# Altium PCB ROS_CAR.PcbDoc (part 1 of 13)
Units mil, origin at the board's own origin, x right, y up, seen from the top; angles counter-clockwise.
Board outline 3937.01 x 3937.01 mil, 2 copper layers (Top Layer, Bottom Layer); 201 components, 155 nets, 998 pads, 0 vias.
Unrouted connection lines stored in the file: 3.
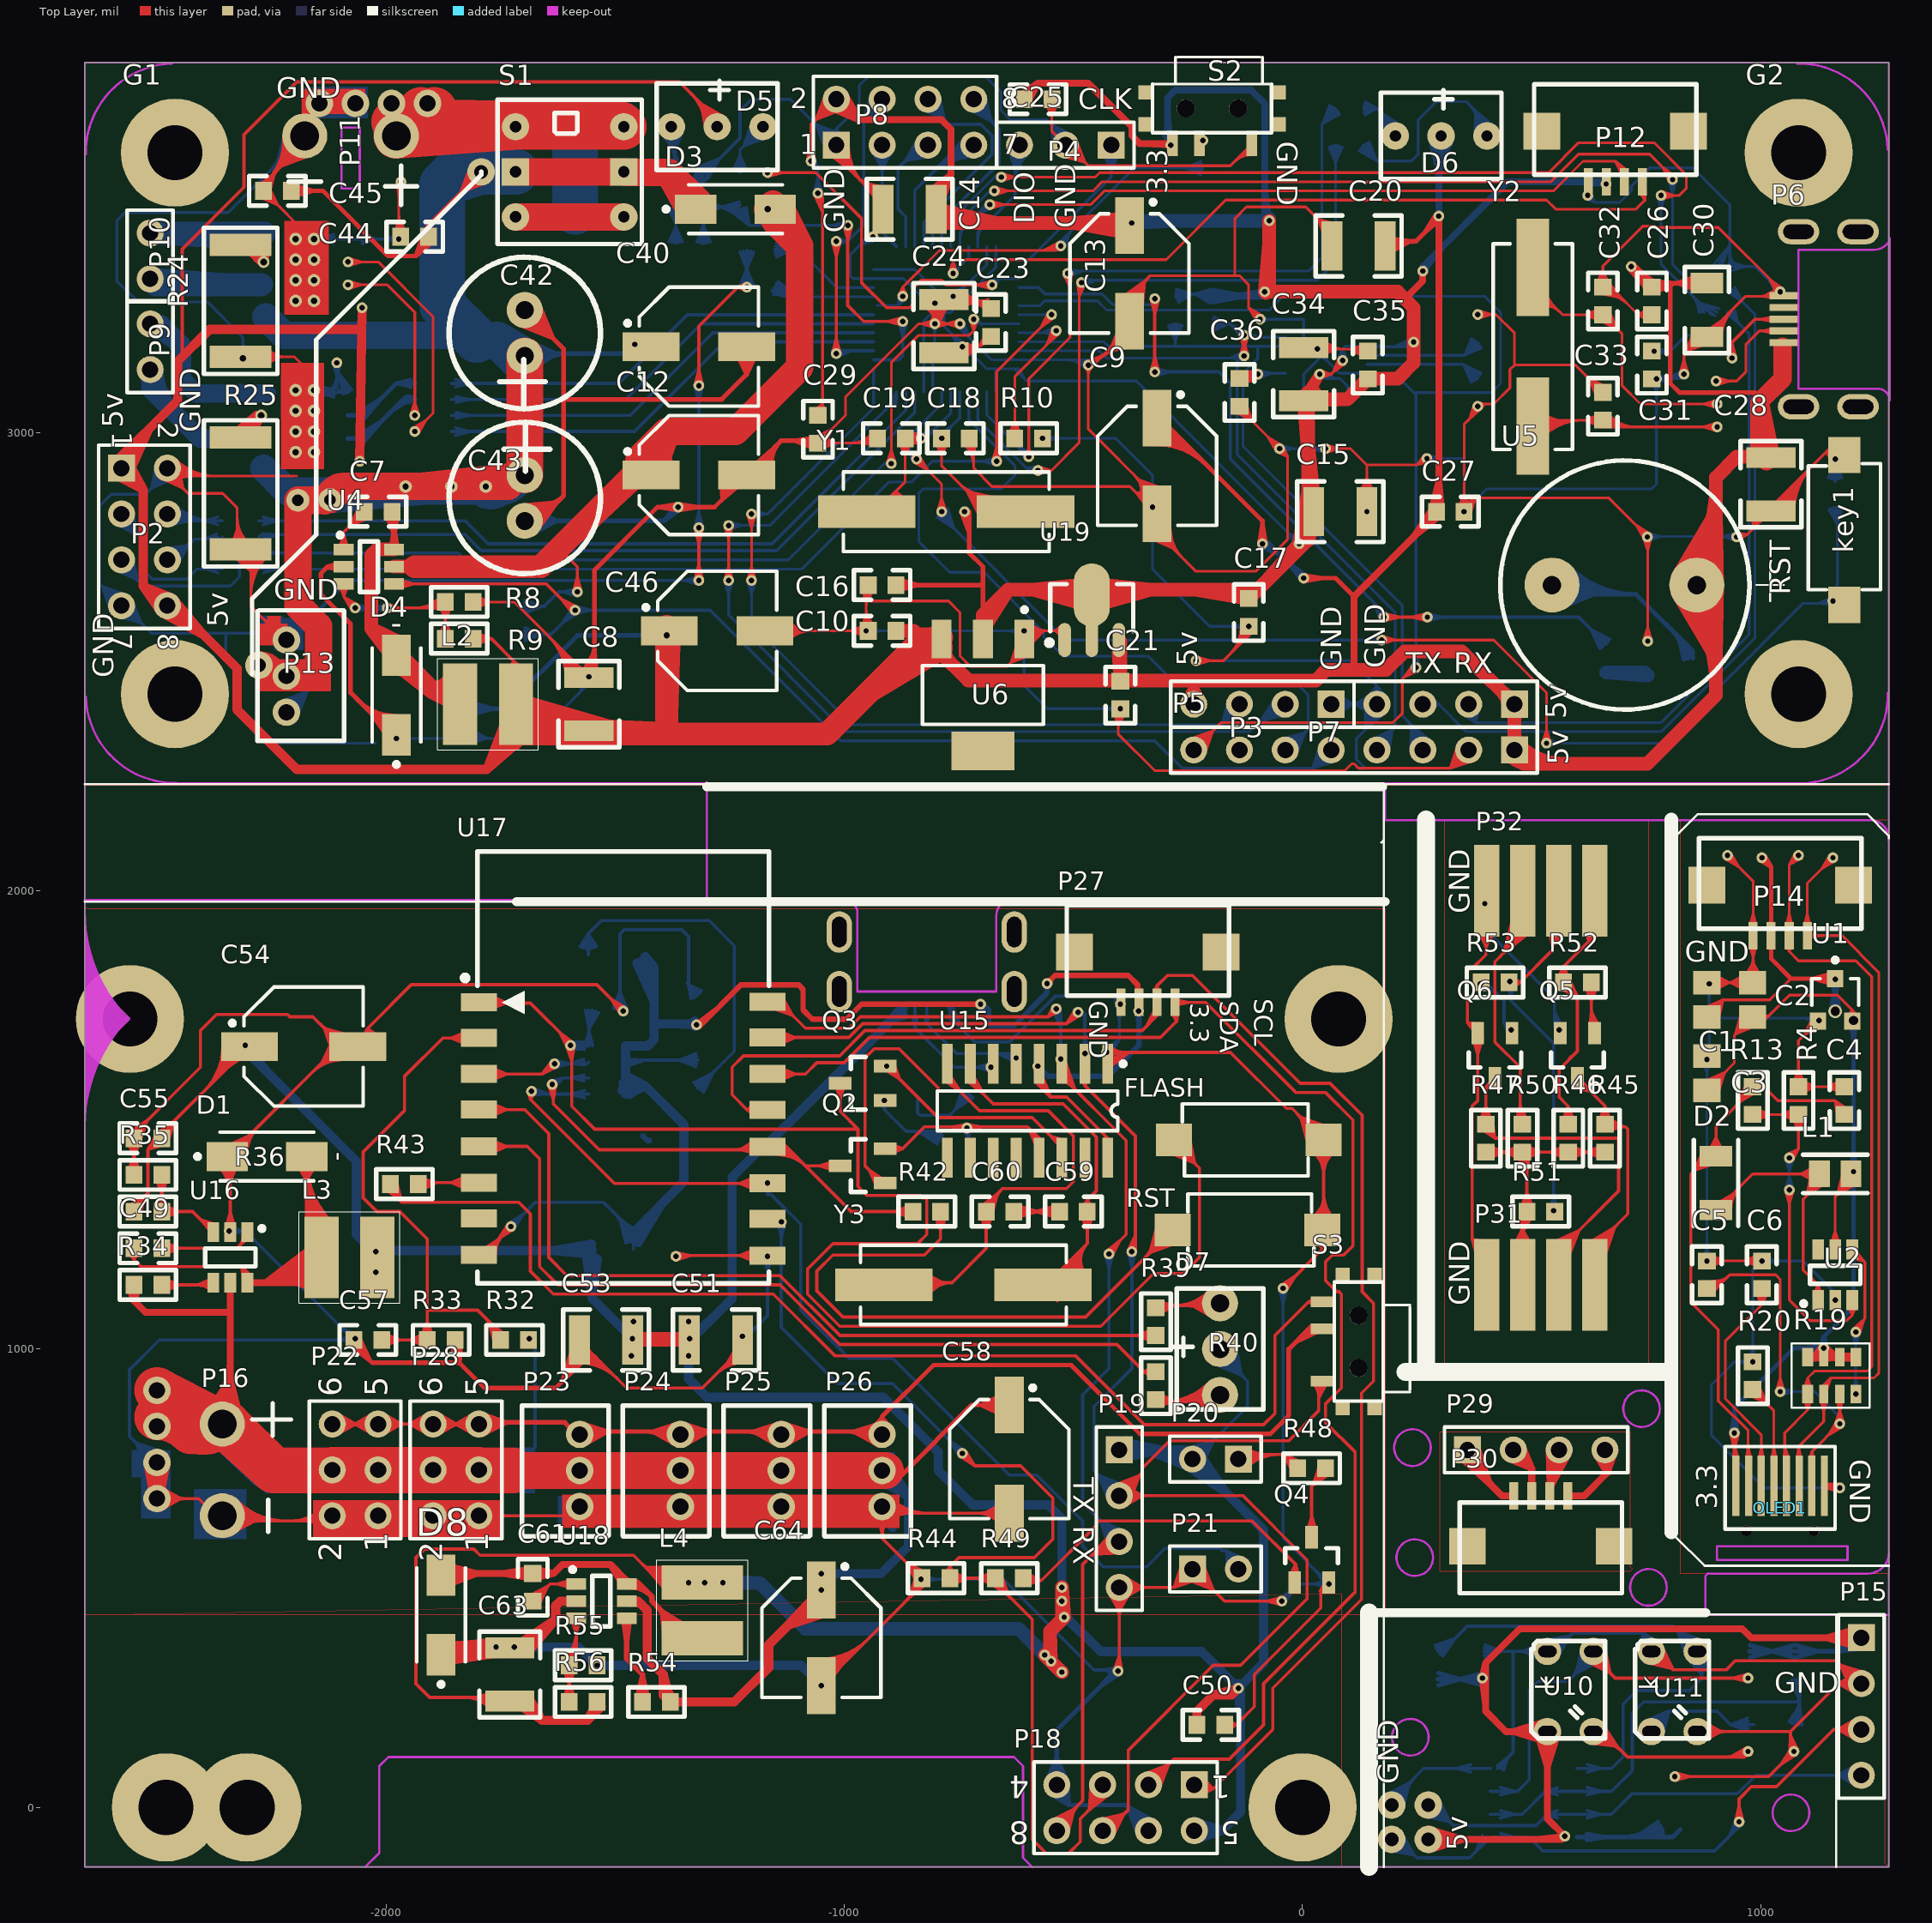
[diagram p0: Top Layer view]
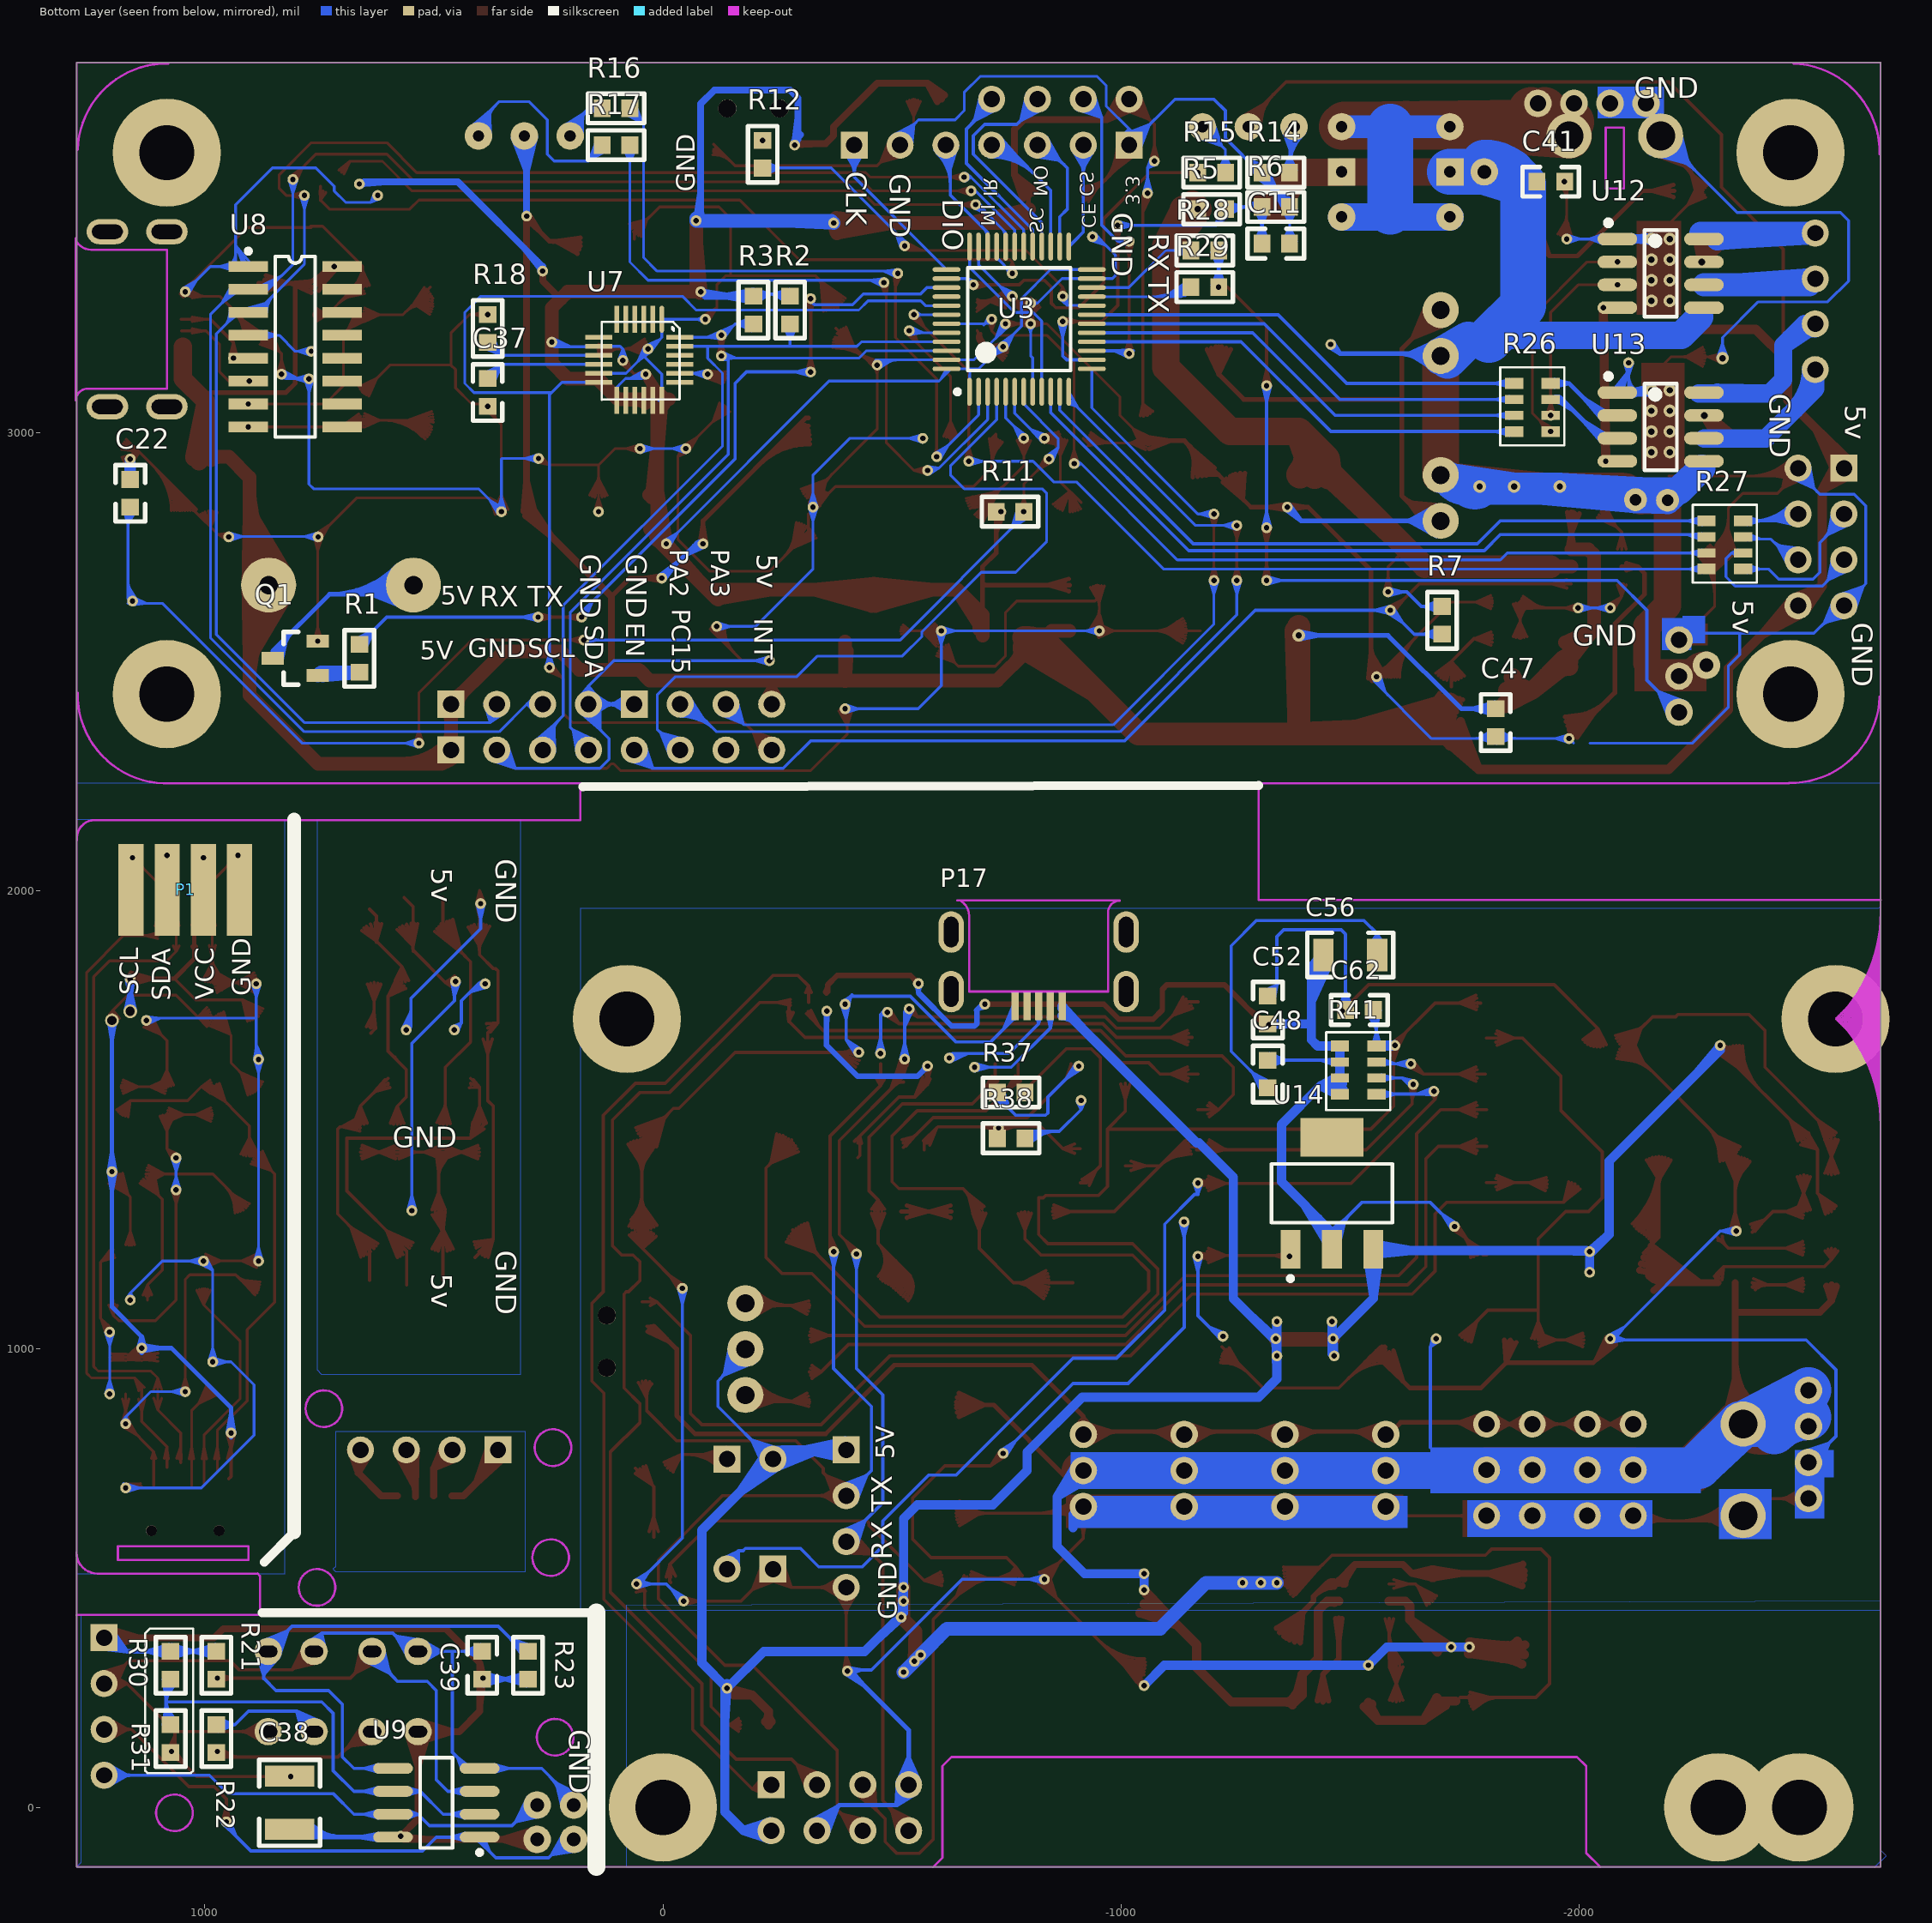
[diagram p1: Bottom Layer view, seen from below]

## Layer stack, top to bottom
Top Layer: signal copper 1.4
Dielectric: dielectric 12.6, FR-4, Dk 4.8
Bottom Layer: signal copper 1.4

## Board outline
-2657.48,-129.92 1279.53,-129.92 1279.53,3807.09 -2657.48,3807.09

## Design rules (kind name [scope] priority, off if disabled: settings)
Clearance Clearance_4 [InNamedPolygon('Top Overlay-No Net') Or  InNamedPolygon('Top Overlay-No Net') Or  InNamedPolygon('Top Overlay-No Net') Or  InNamedPolygon('Top Overlay-No Net') Or  InNamedPolygon('Top Overlay-No Net') Or  InNamedPolygon('Top Overlay-No Net') Or  InNamedPolygon('Top Overlay-No Net') Or  InNamedPolygon('Top Overlay-No Net') Or  InNamedPolygon('Top Overlay-No Net') Or  InNamedPolygon('Top Overlay-No Net') Or  InNamedPolygon('Top Overlay-No Net') Or  InNamedPolygon('Top Overlay-No Net') Or  InNamedPolygon('Top Overlay-No Net') Or  InNamedPolygon('Top Overlay-No Net')] p1: gap=15
Clearance Clearance_3 [InNamedPolygon('Top Overlay-No Net') Or  InNamedPolygon('Top Overlay-No Net')] p2: gap=15
Clearance Clearance_2 [InNamedPolygon('Top Overlay-No Net')] p3: gap=10
Clearance Clearance_1 [InNamedPolygon('Bottom Layer-No Net 1')] p4: gap=10
Clearance [All] p5: gap=5
ComponentClearance [All] p1: gap=10 collisioncheckmode=3 verticalgap=10
PolygonConnect PolygonConnect_4 [All vs IsNamedPolygon('Top Overlay-No Net')] p1: connectstyle=Relief reliefconductorwidth=10 reliefentries=4 polygonreliefangle="90 Angle"
PolygonConnect PolygonConnect_3 [All vs IsNamedPolygon('Top Overlay-No Net') Or  IsNamedPolygon('Top Overlay-No Net') Or  IsNamedPolygon('Top Overlay-No Net') Or  IsNamedPolygon('Top Overlay-No Net') Or  IsNamedPolygon('Top Overlay-No Net') Or  IsNamedPolygon('Top Overlay-No Net') Or  IsNamedPolygon('Top Overlay-No Net') Or  IsNamedPolygon('Top Overlay-No Net') Or  IsNamedPolygon('Top Overlay-No Net') Or  IsNamedPolygon('Top Overlay-No Net') Or  IsNamedPolygon('Top Overlay-No Net') Or  IsNamedPolygon('Top Overlay-No Net') Or  IsNamedPolygon('Top Overlay-No Net') Or  IsNamedPolygon('Top Overlay-No Net')] p2: connectstyle=Relief reliefconductorwidth=10 reliefentries=4 polygonreliefangle="90 Angle"
PolygonConnect PolygonConnect_2 [All vs IsNamedPolygon('Top Overlay-No Net')] p3: connectstyle=Direct reliefconductorwidth=10 reliefentries=4 polygonreliefangle="90 Angle"
PolygonConnect PolygonConnect_1 [All vs IsNamedPolygon('Top Overlay-No Net')] p4: connectstyle=Relief reliefconductorwidth=10 reliefentries=4 polygonreliefangle="90 Angle"
PolygonConnect [All] p5: connectstyle=Relief reliefconductorwidth=10 reliefentries=4 polygonreliefangle="90 Angle"
RoomDefinition moto2 [InComponentClass('moto2')] p1: confinementstyle=ConfineIn formatcopy=TRUE lockcomponents=FALSE outline -4657.48,-3129.92 -2657.48,-3129.92 -2657.48,-2129.92 -4657.48,-2129.92
RoomDefinition ESP_12主板 [InComponentClass('ESP_12主板')] p2: confinementstyle=ConfineIn formatcopy=TRUE lockcomponents=FALSE outline -4657.48,-3129.92 -2657.48,-3129.92 -2657.48,-2129.92 -4657.48,-2129.92
RoomDefinition 电机驱动 [InComponentClass('电机驱动')] p3: confinementstyle=ConfineIn formatcopy=TRUE lockcomponents=FALSE outline -4657.48,-3129.92 -2657.48,-3129.92 -2657.48,-2129.92 -4657.48,-2129.92
RoomDefinition 电机码盘 [InComponentClass('电机码盘')] p4: confinementstyle=ConfineIn formatcopy=TRUE lockcomponents=FALSE outline -4657.48,-3129.92 -2657.48,-3129.92 -2657.48,-2129.92 -4657.48,-2129.92
RoomDefinition stm32_ros_car [InComponentClass('stm32_ros_car')] p5: confinementstyle=ConfineIn formatcopy=TRUE lockcomponents=FALSE outline -4657.48,-3129.92 -2657.48,-3129.92 -2657.48,-2129.92 -4657.48,-2129.92
RoomDefinition OLED096 [InComponentClass('OLED096')] p6: confinementstyle=ConfineIn formatcopy=TRUE lockcomponents=FALSE outline -4657.48,-3129.92 -2657.48,-3129.92 -2657.48,-2129.92 -4657.48,-2129.92
RoutingVias [All] p1: holewidth=23.62 width=39.37 viastyle="Through Hole" minholewidth=28 minwidth=50 maxholewidth=28 maxwidth=50
SolderMaskExpansion [All] p1: expansion=4
TestPointUsage [All] p1: valid=0 allowmultiple=FALSE
Testpoint [All] p1: side=15 testpointundercomponent=TRUE minsize=40 maxsize=100 preferedsize=60 minholesize=0 maxholesize=40 preferedholesize=32 testpointgrid=1 style=1023 order=0-112345678
Width [All] p1: maxlimit=100 minlimit=6 preferedwidth=7
18 further rules are at their usual default settings.

## Classes and differential pairs
component class ESP_12主板: C48 C49 C50 C51 C52 C53 C54 C55 C56 C57 C58 C59 C60 C61 C62 C63 C64 D1 D7 D8 FLASH L3 L4 P16 P17 P18 P19 P20 P21 P22 P23 P24 P25 P26 P27 P28 Q2 Q3 Q4 R32 R33 R34 R35 R36 R37 R38 R39 R40 R41 R42 R43 R44 R48 R49 R54 R55 R56 RST S3 U14 U15 U16 U17 U18 Y3
component class stm32_ros_car: C7 C8 C9 C10 C11 C12 C13 C14 C15 C16 C17 C18 C19 C20 C21 C22 C23 C24 C25 C26 C27 C28 C29 C30 C31 C32 C33 C34 C35 C36 C37 D3 D4 D5 D6 key1 L2 P2 P3 P4 P5 P6 P7 P8 P11 P12 P13 Q1 R1 R2 R3 R5 R6 R7 R8 R9 R10 R11 R12 R14 R15 R16 R17 R18 R27 R28 R29 S1 S2 U3 U4 U5 U6 U7 U8 U19 Y1 Y2
component class 电机驱动: C40 C41 C42 C43 C44 C45 C46 C47 G1 G2 P9 P10 R24 R25 R26 U12 U13
component class OLED096: C1 C2 C3 C4 C5 C6 D2 L1 OLED1 P1 P14 P29 P30 R4 R13 R19 R20 U1 U2
component class 电机码盘: C38 C39 P15 R21 R22 R23 R30 R31 U9 U10 U11
component class moto2: P31 P32 Q5 Q6 R45 R46 R47 R50 R51 R52 R53

## Components (designator, comment, footprint, x,y, rotation, side; value= is the part's Value field where it differs from the comment)
C1 "Cap" 6-0805 882.52,1762.09 r90 top
C2 "Cap" 6-0805 982.52,1762.09 r90 top
C3 "Cap" 6-0805 882.52,1602.09 r90 top
C4 "Cap" LC-0603_C 1182.52,1542.09 r90 top
C5 "Cap" LC-0603_C 882.52,1162.09 r270 top
C6 "Cap" LC-0603_C 1002.52,1162.09 r90 top
C7 "Cap" LC-0603_C -2017.48,2827.09 r0 top
C8 "10uF  5V" LC-1210_C -1557.48,2407.09 r90 top
C9 "100uF 5V" 电容HONOR_63X77#1 -317.48,2927.09 r270 top
C10 "Cap" LC-0603_C -917.48,2567.09 r0 top
C11 "0.1uF" LC-0603_C -1337.48,3412.09 r180 bottom
C12 "Cap Pol1" 电容HONOR_63X54#1 -1317.48,2907.09 r0 top
C13 "10uF" 电容HONOR_63X77#1 -377.48,3347.09 r270 top
C14 "10uF" LC-1210_C -857.48,3487.09 r180 top
C15 "10uF" LC-1210_C 82.52,2827.09 r0 top
C16 "Cap" LC-0603_C -917.48,2667.09 r180 top
C17 "Cap" LC-0603_C -117.48,2607.09 r270 top
C18 "CAP" LC-0603_C -757.48,2987.09 r180 top
C19 "CAP" LC-0603_C -897.48,2987.09 r0 top
C20 "10uF" LC-1210_C 122.52,3407.09 r180 top
C21 "Cap" LC-0603_C -397.48,2427.09 r270 top
C22 "Cap" LC-0603_C 1162.52,2867.09 r90 bottom
C23 "Cap" LC-0603_C -680,3240 r90 top
C24 "" LC-1210_C -782.48,3232.09 r90 top
C25 "Cap" LC-0603_C -577.48,3727.09 r0 top
C26 "CAP" LC-0603_C 762.52,3287.09 r90 top
C27 "Cap" LC-0603_C 322.52,2827.09 r0 top
C28 "Cap" LC-1210_C 1022.52,2887.09 r90 top
C29 "Cap" LC-0603_C -1057.48,3007.09 r270 top
C30 "CAP" LC-1206_C 882.52,3267.09 r270 top
C31 "CAP" LC-0603_C 762.52,3147.09 r90 top
C32 "CAP" LC-0603_C 655.51,3287.09 r270 top
C33 "CAP" LC-0603_C 655.51,3057.09 r270 top
C34 "Cap Pol1" LC-1210_C 2.52,3127.42 r90 top
C35 "Cap" LC-0603_C 142.52,3147.09 r270 top
C36 "Cap" LC-0603_C -137.48,3087.09 r90 top
C37 "Cap" LC-0603_C 382.52,3087.09 r90 bottom
C38 "Cap Pol1" LC-1210_C 814.53,10.08 r90 bottom
C39 "Cap" LC-0603_C 394.53,310.08 r90 bottom
C40 "100uF 50v" 电容HONOR_63X77#1 -1317.48,3187.09 r0 top
C41 "Cap" LC-0603_C -1937.48,3547.09 r180 bottom
C42 "Cap Pol1" 100UF -1697.48,3167.09 r90 top
C43 "Cap Pol1" 100UF -1697.48,2907.09 r270 top
C44 "" LC-0603_C -1937.48,3427.09 r180 top
C45 "" LC-0603_C -2237.48,3527.09 r180 top
C46 "10uF" 电容HONOR_63X77#1 -1277.48,2567.09 r0 top
C47 "Cap" LC-0603_C -1817.48,2367.09 r270 bottom
C48 "CAP" LC-0603_C -1320,1600 r90 bottom
C49 "Cap" LC-0603_C -2520,1220 r180 top
C50 "Cap" LC-0603_C -200,180 r0 top
C51 "Cap" LC-1210_C -1280,1020 r180 top
C52 "Cap" LC-0603_C -1320,1740 r90 bottom
C53 "10uF  5V" LC-1210_C -1520,1020 r180 top
C54 "100uF 5V" 电容HONOR_63X77#2 -2180,1660 r0 top
C55 "Cap" LC-0603_C -2520,1460 r0 top
C56 "CAP" LC-1206_C -1500,1860 r180 bottom
C57 "0.1uF" LC-0603_C -2040,1020 r180 top
C58 "Cap Pol1" 电容HONOR_63X54#2 -640,760 r270 top
C59 "CAP" LC-0603_C -500,1300 r0 top
C60 "CAP" LC-0603_C -660,1300 r180 top
C61 "Cap" LC-0603_C -1680,480 r90 top
C62 "Cap" LC-0603_C -1520,1740 r0 bottom
C63 "10uF  5V" LC-1210_C -1730,290 r90 top
C64 "Cap Pol1" 电容HONOR_63X54#1 -1050,370 r270 top
D1 "1N5819" SMA -2260,1420 r0 top
D2 "1210" LC-1206_L 902.52,1362.09 r90 top
D3 "1N5819" SMA -1237.48,3487.09 r0 top
D4 "1N5819" SMA -1977.48,2427.09 r90 top
D5 "双色共阳led" 共阳双色LED#1 -1277.48,3667.09 r0 top
D6 "双色共阳led" 共阳双色LED#1 302.52,3647.09 r0 top
D7 "双色共阳led" 共阳双色LED#2 -180,1000 r90 top
D8 "1N5819" SMA -1880,420 r90 top
FLASH "KEY" SMD轻触按键 -117.48,1456.38 r180 top (schematic designator key2)
G1 "螺丝孔" M3螺丝孔#1 -2457.48,3610.08 r0 top
G2 "螺丝孔" M3螺丝孔#2 1082.52,3630.08 r0 top
key1 "KEY" SMD轻触按键 1182.52,2787.09 r90 top
L1 "Inductor Iron" LC-0805_L 1162.52,1382.09 r180 top
L2 "Inductor Iron" 电感GDCD4532 -1777.48,2407.09 r0 top
L3 "Inductor Iron" 电感GDCD4532 -2080,1200 r0 top
L4 "Inductor Iron" 电感GDCD4532 -1310,430 r90 top
OLED1 "OLED-0.69" OLED-0.69 1042.52,702.09 r0 top
P1 "4贴片排针" 4针贴片接头2.0 1042.52,2002.09 r90 bottom
P2 "编码器接口" HDR2X4 -2577.48,2922.09 r270 top
P3 "超声波" HDR1X4 62.52,2407.09 r180 top
P4 "Header 3" HDR1X3 -417.48,3627.09 r180 top
P5 "Header 8" HDR1X8 462.52,2307.09 r180 top
P6 "micro USB" "micro 5P沉板式0.8四脚全插无导位有孔" 1082.52,3247.09 r0 top
P7 "串口" HDR1X4 462.52,2407.09 r180 top
P8 "NRF24l01" HDR2X4 -1017.48,3627.09 r0 top
P9 "Header 2" HDR1X2#1 -2515,3137.09 r90 top
P10 "Header 2" HDR1X2#1 -2515,3335 r90 top
P11 "POWER" 电源 -2077.48,3647.09 r180 top
P12 "OLED" "1.0MM 翻盖 下接 FPC连接器 4P" 682.52,3547.09 r270 top
P13 "Header 3" "AMP 3针连接件"#1 -2217.48,2547.09 r0 top
P14 "micro USB" "1.0MM 翻盖 下接 FPC连接器 4P" 1042.52,1902.09 r270 top
P15 "Header 4" HDR1X4 1219.53,370.08 r270 top
P16 "POWER" 电源 -2357.48,736.38 r270 top
P17 "micro USB" "micro 5P沉板式0.8四脚全插无导位有孔" -820,1780 r90 bottom
P18 "Header 4X2A" HDR2X4_CEN -236.22,49.28 r180 top
P19 "Header 4" HDR1X4 -400,780 r270 top
P20 "Header 2" HDR1X2#2 -140,760 r180 top
P21 "Header 2" HDR1X2#2 -240,520 r0 top
P22 "Header 3X2" HDR2X3 -2017.48,636.38 r90 top
P23 "Header 3" "AMP 3针连接件"#2 -1577.48,656.38 r180 top
P24 "Header 3" "AMP 3针连接件"#2 -1357.48,656.38 r180 top
P25 "Header 3" "AMP 3针连接件"#2 -1137.48,656.38 r180 top
P26 "Header 3" "AMP 3针连接件"#2 -917.48,656.38 r180 top
P27 "OLED" "1.0MM 翻盖 下接 FPC连接器 4P" -337.48,1756.38 r270 top
P28 "Header 3X2" HDR2X3 -1797.48,636.38 r90 top
P29 "Header 4" HDR1X4 360,780 r0 top
P30 "micro USB" "1.0MM 翻盖 下接 FPC连接器 4P" 520,680 r90 top
P31 "外接IO" 4针贴片接头2.0 520,1140 r90 top
P32 "电机端" 4针贴片接头2.0 520,2000 r90 top
Q1 "NPN" LC-SOT-23 802.52,2507.09 r180 bottom
Q2 "NPN" LC-SOT-23 -960,1400 r0 top
Q3 "NPN" LC-SOT-23 -960,1580 r0 top
Q4 "NPN" LC-SOT-23 20,540 r270 top
Q5 "NPN" LC-SOT-23 600,1640 r90 top
Q6 "NPN" LC-SOT-23 420,1640 r90 top
R1 "Res2" LC-0603_R 662.52,2507.09 r90 bottom
R2 "Res2" LC-0603_R -277.48,3267.09 r270 bottom
R3 "Res2" LC-0603_R -197.48,3267.09 r270 bottom
R4 "Res2" LC-0603_R 1082.52,1542.09 r90 top
R5 "Res2" LC-0603_R -1197.48,3487.09 r180 bottom
R6 "Res2" LC-0603_R -1337.48,3492.09 r180 bottom
R7 "Res2" LC-0603_R -1700.47,2590.08 r90 bottom
R8 "Res2" LC-0603_R -1840.47,2630.08 r0 top
R9 "Res2" LC-0603_R -1840.47,2550.08 r180 top
R10 "Res2" LC-0603_R -597.48,2987.09 r180 top
R11 "Res2" LC-0603_R -757.48,2827.09 r180 bottom
R12 "Res2" LC-0603_R -217.48,3607.09 r90 bottom
R13 "Res2" LC-0603_R 982.52,1542.09 r270 top
R14 "Res2" LC-0603_R -1337.48,3567.09 r180 bottom
R15 "Res2" LC-0603_R -1197.48,3567.09 r180 bottom
R16 "Res2" LC-0603_R 102.52,3707.09 r0 bottom
R17 "Res2" LC-0603_R 102.52,3627.09 r0 bottom
R18 "Res2" LC-0603_R 382.52,3227.09 r90 bottom
R19 "RES_PACK4" RES4 1102.52,982.09 r270 top
R20 "Res2" LC-0603_R 982.52,942.09 r270 top
R21 "Res2" LC-0603_R 974.53,310.08 r270 bottom
R22 "Res2" LC-0603_R 974.53,150.08 r90 bottom
R23 "Res2" LC-0603_R 294.53,310.08 r90 bottom
R24 "Res2" LC-2512_R -2317.48,3287.09 r270 top
R25 "Res2" LC-2512_R -2317.48,2867.09 r270 top
R26 "RES_PACK4" RES4 -1937.48,3107.09 r0 bottom
R27 "RES_PACK4" RES4 -2357.48,2807.09 r0 bottom
R28 "Res2" LC-0603_R -1182.48,3397.09 r180 bottom
R29 "Res2" LC-0603_R -1182.48,3317.09 r180 bottom
R30 "Res2" LC-0603_R 1074.53,310.08 r270 bottom
R31 "Res2" LC-0603_R 1074.53,150.08 r270 bottom
R32 "Res2" LC-0603_R -1720,1020 r180 top
R33 "Res2" LC-0603_R -1880,1020 r0 top
R34 "Res2" LC-0603_R -2520,1140 r180 top
R35 "Res2" LC-0603_R -2520,1380 r180 top
R36 "Res2" LC-0603_R -2520,1300 r0 top
R37 "Res2" LC-0603_R -760,1560 r180 bottom
R38 "Res2" LC-0603_R -760,1460 r180 bottom
R39 "Res2" LC-0603_R -320,1060 r90 top
R40 "Res2" LC-0603_R -320,920 r270 top
R41 "RES_PACK4" RES4 -1477.48,1556.38 r180 bottom
R42 "Res2" LC-0603_R -820,1300 r0 top
R43 "Res2" LC-0603_R -1960,1360 r0 top
R44 "Res2" LC-0603_R -800,500 r180 top
R45 "Res2" LC-0603_R 660,1460 r90 top
R46 "Res2" LC-0603_R 580,1460 r270 top
R47 "Res2" LC-0603_R 400,1460 r90 top
R48 "Res2" LC-0603_R 20,740 r0 top
R49 "Res2" LC-0603_R -640,500 r180 top
R50 "Res2" LC-0603_R 480,1460 r90 top
R51 "Res2" LC-0603_R 520,1300 r180 top
R52 "Res2" LC-0603_R 600,1800 r180 top
R53 "Res2" LC-0603_R 420,1800 r0 top
R54 "Res2" LC-0603_R -1410,230 r0 top
R55 "Res2" LC-0603_R -1570,310 r0 top
R56 "Res2" LC-0603_R -1570,230 r180 top
RST "KEY" SMD轻触按键 -120,1260 r0 top (schematic designator key3)
S1 "8*8电源开关" 8*8自锁开关 -1717.48,3667.09 r0 top
S2 "贴片开关" KEY -197.48,3707.09 r270 top
S3 "贴片开关" KEY 122.52,1016.38 r180 top
U1 "ME6206AXX" sot23 1162.52,1762.09 r0 top
U2 "SY7208" LC-SOT-23-6 1162.52,1162.09 r270 top
U3 "STM32F103C8T6" LQFP48_L -777.48,3247.09 r90 bottom
U4 "MP2359DJ" LC-SOT-23-6 -2037.48,2707.09 r180 top
U5 "蜂鸣器" BELL 702.52,2667.09 r0 top
U6 "LM1117-3.3" SOT223 -697.48,2427.09 r180 top
U7 "MPU6050" QFN24 2.52,3247.09 r270 bottom
U8 "CH340G" SOP16M 802.52,3187.09 r270 bottom
U9 "LM393D" SO8_N 494.53,10.08 r0 bottom
U10 "光电对管" 马达光电对管 534.61,165.35 r90 top
U11 "光电对管" 马达光电对管 761.38,165.35 r90 top
U12 "A4950" LC-SOIC-8_150mil -2177.48,3347.09 r270 bottom
U13 "A4950" LC-SOIC-8_150mil -2177.48,3012.09 r270 bottom
U14 "LM1117-3.3" SOT223 -1460,1340 r180 bottom
U15 "CH340G" SOP16M -600,1520 r180 top
U16 "MP2359DJ" LC-SOT-23-6 -2340,1200 r90 top
U17 "ESP-12F" ESP_12 -1797.48,1756.38 r0 top
U18 "MP2492" LC-SOT-23-6 -1530,450 r180 top
U19 "ME6206AXX" LC-SOT-89 -460,2547.09 r270 top
Y1 "12MHz" 49SMD -777.48,2827.09 r0 top
Y2 "12MHz" 49SMD 502.52,3187.09 r90 top
Y3 "12MHz" 49SMD -740,1140 r0 top

## Footprints (in the part's own frame and the unit in brackets; to place one, negate y for a bottom-side part, rotate by r counter-clockwise, add the part's x,y. Pads: shape width x height; smd on the part's side, far side on the other; paste and mask are expansions set on the pad)
"1.0MM 翻盖 下接 FPC连接器 4P" [mil]
  rect 60x19.68 smd: 1(0,59.06) 2(0,19.69) 3(0,-19.68) 4(0,-59.06)
  rect 80x80 smd: ""(-110,160) ""(-110,-160)
  silkscreen extent -213,-177 -15,177
4针贴片接头2.0 [mm] "2mm间距"
  rect 5.08x1.4 smd: 1(0,3) 2(0,1) 3(0,-1) 4(0,-3)
6-0805 [mm] "Chip Resistor; Body 2.0 x 1.3 mm (LxW typ)"
  rect 1.3x1.5 smd: 1(-0.95,0) 2(0.95,0)
8*8自锁开关 [mil]
  rect 60x60 hole 25: 1(0,-98.43) 1(236.22,-98.43)
  round 60 hole 25: 2(0,-196.85) 2(0,0) 2(236.22,-196.85) 2(236.22,0)
  silkscreen extent -39,-256 276,59
49SMD [mm]
  rect 5.4x1.8 smd: 1(-4.4,0) 2(4.4,0)
  silkscreen extent -5.7,-2.2 5.7,2.2
100UF [mm]
  round 2 hole 1: 1(0,0) 2(2.54,0)
  silkscreen extent -6.4,-4.2 5.47,4.2
"AMP 3针连接件"#1 [mil] "舵机接头"
  round 60 hole 35.4: 1(0,0) 2(0,-78.74) 3(0,-157.48)
  silkscreen extent -63,-220 126,65
"AMP 3针连接件"#2 [mil] "舵机接头"
  round 60 hole 35.43: 1(0,0) 2(0,-78.74) 3(0,-157.48)
  silkscreen extent -63,-220 126,65
BELL [mil]
  round 120 hole 40: 1(158,0) 2(-158,0)
  silkscreen extent -271,-272 348,272
ESP_12 [mm]
  rect 2x1 smd: 1(0,0) 2(0,-1.97) 3(0,-3.97) 4(0,-5.94) 5(0,-7.98) 6(0,-9.99) 7(0,-11.98) 8(0,-13.99) 9(16,-14.03) 10(16,-11.99) 11(16,-10.03) 12(16,-8.01) 13(16,-5.95) 14(16,-3.97) 15(16,-1.95) 16(16,0.03)
  silkscreen extent -0.91,-15.57 16.08,8.37
HDR1X2#1 [mm] "Connector; Header; 2 Position"
  round 1.5 hole 0.9: 1(0,0) 2(2.54,0)
  silkscreen extent -1.27,-1.27 3.81,1.27
HDR1X2#2 [mm] "Connector; Header; 2 Position"
  rect 1.5x1.5 hole 0.9: 1(0,0)
  round 1.5 hole 0.9: 2(2.54,0)
  silkscreen extent -1.27,-1.27 3.81,1.27
HDR1X3 [mm] "Connector; Header; 3 Position"
  rect 1.5x1.5 hole 0.9: 1(0,0)
  round 1.5 hole 0.9: 2(2.54,0) 3(5.08,0)
  silkscreen extent -1.27,-1.27 6.35,1.27
HDR1X4 [mm] "Connector; Header; 4 Position"
  rect 1.5x1.5 hole 0.9: 1(0,0)
  round 1.5 hole 0.9: 2(2.54,0) 3(5.08,0) 4(7.62,0)
  silkscreen extent -1.27,-1.27 8.89,1.27
HDR1X8 [mm] "Connector; Header; 8 Position"
  rect 1.5x1.5 hole 0.9: 1(0,0)
  round 1.5 hole 0.9: 2(2.54,0) 3(5.08,0) 4(7.62,0) 5(10.16,0) 6(12.7,0) 7(15.24,0) 8(17.78,0)
  silkscreen extent -1.27,-1.27 19.05,1.27
HDR2X3 [mm] "Connector; Header; 3x2 Position"
  round 1.5 hole 0.9: 1(0,0) 2(0,2.54) 3(2.54,0) 4(2.54,2.54) 5(5.08,0) 6(5.08,2.54)
  silkscreen extent -1.27,-1.27 6.35,3.81
HDR2X4 [mm] "Connector; Header; 4x2 Position"
  rect 1.5x1.5 hole 0.9: 1(0,0)
  round 1.5 hole 0.9: 2(0,2.54) 3(2.54,0) 4(2.54,2.54) 5(5.08,0) 6(5.08,2.54) 7(7.62,0) 8(7.62,2.54)
  silkscreen extent -1.27,-1.27 8.89,3.81
HDR2X4_CEN [mm] "Connector; Header; 4x2 Position"
  rect 1.5x1.5 hole 0.9: 1(0,0)
  round 1.5 hole 0.9: 2(2.54,0) 3(5.08,0) 4(7.62,0) 5(0,2.54) 6(2.54,2.54) 7(5.08,2.54) 8(7.62,2.54)
  silkscreen extent -1.27,-1.27 8.89,3.81
KEY [mm]
  rect 1.4x0.6 smd: 1(1.95,2.2) 2(1.95,-0.7) 3(1.95,-2.2)
  rect 0.8x0.8 smd: ""(-0.889,3.683) ""(-0.889,-3.683) ""(0.889,3.683) ""(0.889,-3.683)
  round 1 hole 1: ""(0,1.45) ""(0,-1.45)
  silkscreen extent -2.85,-3.3 1.35,3.3
LC-0603_C [mm]
  rect 0.93x0.98 smd: 1(-0.77,0) 2(0.77,0)
  silkscreen extent -1.56,-0.82 1.56,0.82, body extent -0.8,-0.4 0.8,0.4, height 0.3
LC-0603_R [mm]
  rect 0.93x0.98 smd: 1(-0.77,0) 2(0.77,0)
  silkscreen extent -1.56,-0.82 1.56,0.82, body extent -0.85,-0.4 0.85,0.4, height 0.56
LC-0805_L [mm]
  rect 1.16x1.47 smd: 1(-0.875,0) 2(0.875,0)
  silkscreen extent -1.78,-1.06 1.78,1.06, body extent -1.02,-0.64 1.03,0.64, height 0.6
LC-1206_C [mm]
  rect 1.13x1.8 smd: 1(-1.49,0) 2(1.49,0)
  silkscreen extent -2.38,-1.23 2.38,1.23, body extent -1.6,-0.81 1.6,0.79, height 1
LC-1206_L [mm]
  rect 1.13x1.8 smd: 1(-1.49,0) 2(1.49,0)
  silkscreen extent -2.38,-1.23 2.38,1.23
LC-1210_C [mm]
  rect 1.16x2.72 smd: 1(-1.475,0) 2(1.475,0)
  silkscreen extent -2.38,-1.69 2.38,1.69, body extent -1.6,-1.25 1.6,1.25, height 1.3
LC-2512_R [mm]
  rect 1.25x3.42 smd: 1(-3.1,0) 2(3.1,0)
  silkscreen extent -4.05,-2.04 4.05,2.04, body extent -3.16,-1.6 3.16,1.6, height 0.62
LC-SOIC-8_150mil [mm]
  oval 0.7x2.2 smd: 1(-1.905,-2.4) 2(-0.635,-2.4) 3(0.635,-2.4) 4(1.905,-2.4) 5(1.905,2.4) 6(0.635,2.4) 7(-0.635,2.4) 8(-1.905,2.4)
  silkscreen extent -2.95,-3.05 2.4,0.9
LC-SOT-23 [mm]
  rect 1.25x0.7 smd: 1(1.25,-0.95) 1(1.25,-0.95) 1(1.25,-0.95) 2(1.25,0.95) 2(1.25,0.95) 2(1.25,0.95) 3(-1.25,0) 3(-1.25,0) 3(-1.25,0)
  silkscreen extent -0.65,-1.46 0.17,1.46, body extent -1.5,-1.5 1.5,1.5, height 1.3
LC-SOT-23-6 [mm]
  rect 1.1x0.65 smd: 1(1.4,-0.95) 2(1.4,0) 3(1.4,0.95) 4(-1.4,0.95) 5(-1.4,0) 6(-1.4,-0.95)
  silkscreen extent -0.5,-1.87 1.72,1.4
LC-SOT-89 [mm]
  oval 1.9x0.7 smd: 1(0,-1.5) 3(0,1.5)
  oval 3.5x2 smd: 2(-2.5,0)
  oval 2.1x0.7 smd: 2(-0.1,0)
  silkscreen extent -3.1,-2.5 0.3,2.3, body extent -3.75,-2.25 0.55,2.25, height 1.51
LQFP48_L [mm] "Thin QFP, 48-Leads, Body 7x7mm, Pitch 0.5mm, IPC High Density"
  oval 1.55x0.25 smd: 1(-4.025,2.75) 2(-4.025,2.25) 3(-4.025,1.75) 4(-4.025,1.25) 5(-4.025,0.75) 6(-4.025,0.25) 7(-4.025,-0.25) 8(-4.025,-0.75) 9(-4.025,-1.25) 10(-4.025,-1.75) 11(-4.025,-2.25) 12(-4.025,-2.75) 25(4.025,-2.75) 26(4.025,-2.25) 27(4.025,-1.75) 28(4.025,-1.25) 29(4.025,-0.75) 30(4.025,-0.25) 31(4.025,0.25) 32(4.025,0.75) 33(4.025,1.25) 34(4.025,1.75) 35(4.025,2.25) 36(4.025,2.75)
  oval 0.25x1.55 smd: 13(-2.75,-4.025) 14(-2.25,-4.025) 15(-1.75,-4.025) 16(-1.25,-4.025) 17(-0.75,-4.025) 18(-0.25,-4.025) 19(0.25,-4.025) 20(0.75,-4.025) 21(1.25,-4.025) 22(1.75,-4.025) 23(2.25,-4.025) 24(2.75,-4.025) 37(2.75,4.025) 38(2.25,4.025) 39(1.75,4.025) 40(1.25,4.025) 41(0.75,4.025) 42(0.25,4.025) 43(-0.25,4.025) 44(-0.75,4.025) 45(-1.25,4.025) 46(-1.75,4.025) 47(-2.25,4.025) 48(-2.75,4.025)
  silkscreen extent -4.15,-2.85 2.85,3.55, body extent -3.5,-3.5 3.5,3.5, height 1.6
M3螺丝孔#1 [mm]
  round 6 hole 3.05: 0(-0.08,0.004)
M3螺丝孔#2 [mm]
  round 6 hole 3.05: 0(0.004,-0.504)
"micro 5P沉板式0.8四脚全插无导位有孔" [mm]
  oval 2.3x1.4 hole 0.8 slot 1.7 at 0 deg: 0(0,-4.85) 0(0,4.85) 0(3.3,-4.85) 0(3.3,4.85)
  rect 1.6x0.4 smd: 1(-0.8,1.3) 2(-0.8,0.65) 3(-0.8,0) 4(-0.8,-0.65) 5(-0.8,-1.3)
  Keep-Out Layer lines w0.127: 4.196,3.85 0,3.85 0,-3.85 4.39,-3.85 ; 4.205,3.852 ccw(c4.196,4.821) 5.002,4.283 ; 4.377,-3.85 cw(c4.39,-4.5) 5.04,-4.5 ; 5.05,-4.5 5.05,4.5
OLED-0.69 [mm] "OLED 0.69屏幕"
  round 0.6 hole 0.6: 0(-1.875,-2.5) 0(1.875,-2.5)
  rect 0.4x3.35 smd: 1(-2.45,0) 2(-1.75,0) 3(-1.05,0) 4(-0.35,0) 5(0.35,0) 6(1.05,0) 7(1.75,0) 8(2.45,0)
  silkscreen extent -3.05,-2.41 3.05,2.16
QFN24 [mm]
  oval 1.5x0.25 smd: 1(0,0)
  rect 1.5x0.25 smd: 2(0,-0.5) 3(0,-1) 4(0,-1.5) 5(0,-2) 6(0,-2.5) 13(4.5,-2.5) 14(4.5,-2) 15(4.5,-1.5) 16(4.5,-1) 17(4.5,-0.5) 18(4.5,0)
  rect 0.25x1.5 smd: 7(1,-3.5) 8(1.5,-3.5) 9(2,-3.5) 10(2.5,-3.5) 11(3,-3.5) 12(3.5,-3.5) 19(3.5,1) 20(3,1) 21(2.5,1) 22(2,1) 23(1.5,1) 24(1,1)
  silkscreen extent 0.15,-3.33 4.47,0.99
RES4 [mil]
  rect 40x23.62 smd: 1(0,0) 4(0,105) 5(80,105) 8(80,0)
  rect 40x20 smd: 2(0,35) 3(0,70) 6(80,70) 7(80,35)
  silkscreen extent -30,-35 110,135
SMA [mm]
  rect 2.3x1.6 smd: 1(-2.2,0) 2(2.2,0)
  silkscreen extent -3.97,-1.35 2.6,1.35
SMD轻触按键 [mm]
  rect 2x1.8 smd: 1(-4.15,0) 2(4.15,0)
  silkscreen extent -3.3,-2 3.68,2
SO8_N [mm] "SOIC, 8-Leads, Body 4.9x3.9mm, Pitch 1.27mm, IPC Medium Density"
  oval 2.2x0.6 smd: 1(-2.4,1.905) 2(-2.4,0.635) 3(-2.4,-0.635) 4(-2.4,-1.905) 5(2.4,-1.905) 6(2.4,-0.635) 7(2.4,0.635) 8(2.4,1.905)
  silkscreen extent -2.52,-2.5 0.9,2.88, body extent -1.95,-2.45 1.95,2.45, height 1.75
SOP16M [mm]
  rect 0.6x2.2 smd: 1(-4.445,-2.6) 2(-3.175,-2.6) 3(-1.905,-2.6) 4(-0.635,-2.6) 5(0.635,-2.6) 6(1.905,-2.6) 7(3.175,-2.6) 8(4.445,-2.6) 9(4.445,2.6) 10(3.175,2.6) 11(1.905,2.6) 12(0.635,2.6) 13(-0.635,2.6) 14(-1.905,2.6) 15(-3.175,2.6) 16(-4.445,2.6)
  silkscreen extent -5.42,-2.72 5,1.1
sot23 [mm] "SOT-23; 3 Leads; Body 3.1 x 2.5 mm, inc. leads (LxW max), Alternate Lead Configuration"
  rect 0.9x0.95 smd: 1(0,1.175) 2(0.95,-1.175) 3(-0.95,-1.175)
  silkscreen extent -1.3,-0.3 1.3,2.32
SOT223 [mm] "SOT-223/SC-73; 4 Leads; Body 6.7 x 7.3 mm, inc. leads (LxW max)"
  rect 1.1x2.15 smd: 1(-2.3,-3.1) 2(0,-3.1) 3(2.3,-3.1)
  rect 3.5x2.15 smd: 4(0,3.1)
  silkscreen extent -3.35,-4.85 3.35,1.63
共阳双色LED#1 [mil]
  round 60 hole 25: 1(-100,0) 2(0,0) 3(100,0)
  silkscreen extent -132,-94 132,100
共阳双色LED#2 [mil]
  round 78.74 hole 39.37: 1(-100,0) 2(0,0) 3(100,0)
  silkscreen extent -132,-94 132,100
电容HONOR_63X54#1 [mm] "10V220uf 10V 6.3X5 .4/6.3*5.4"
  rect 3.15x1.6 smd: 1(-2.65,0) 2(2.65,0)
  silkscreen extent -4.07,-3.3 3.3,3.3
电容HONOR_63X54#2 [mm] "10V220uf 10V 6.3X5 .4/6.3*5.4"
  rect 3.15x1.6 smd: 1(-3,0) 2(3,0)
  silkscreen extent -4.07,-3.3 3.3,3.3
电容HONOR_63X77#1 [mm] "6.3*7.7 6V470uf/6.3*7.7"
  rect 3.15x1.6 smd: 1(-2.65,0) 2(2.65,0)
  silkscreen extent -4.07,-3.3 3.3,3.3
电容HONOR_63X77#2 [mm] "6.3*7.7 6V470uf/6.3*7.7"
  rect 3.15x1.6 smd: 1(-3,0) 2(3,0)
  silkscreen extent -4.07,-3.3 3.3,3.3
电感GDCD4532 [mm] "封装规格：4532"
  rect 1.9x4.5 smd: 1(-1.55,0) 2(1.55,0)
  silkscreen extent -2.79,-2.54 2.79,2.54
电源 [mm] "18AWG以上电源入口"
  round 2.5 hole 1.6: 1(-2.54,0) 2(2.54,0)
  silkscreen extent -3.68,1.65 3.43,3.81
马达光电对管 [mil]
  round 60 hole 25 slot 40 at 90 deg: 1(0,0) 2(0,-100) 3(175,0) 4(175,-100)
  silkscreen extent -15,-126 198,35

## Part data
C1 C2 C3 C4 C5 C6 C7 C10 C16 C17 C21 C22 C23 C25 C27 C28 C29 C35 C36 C37 C39 C41 C47 C49 C50 C51 C52 C55 C61 C62: "Capacitor"
C8 C9 C13 C14 C15 C20 C24 C40 C46 C53 C54 C63: library part "Cap Pol1", "Polarized Capacitor (Radial)"
C11 C44 C45 C57: library part Cap, "Capacitor"
C12 C34 C38 C42 C43 C58 C64: "Polarized Capacitor (Radial)"
D1 D2 D3 D4 D8: library part 1N4001
L1 L2 L3 L4: "Magnetic-Core Inductor"
P2 P8: library part "Header 4X2", "Header, 4-Pin, Dual row"
P3 P7 P9: library part "Header 4", "Header, 4-Pin"
P4 P13 P23 P24 P25 P26: "Header, 3-Pin"
P5: "Header, 8-Pin"
P6 P17: library part "micro 5P"
P10 P20 P21: "Header, 2-Pin"
P12 P14 P27 P30: library part "FPC 4P 1MM"
P15 P19 P29: "Header, 4-Pin"
P18: "Header, 4-Pin, Dual row"
P22 P28: "Header, 3-Pin, Dual row"
P31 P32: library part 4线焊接点
R1 R2 R3 R4 R5 R6 R7 R8 R9 R10 R11 R12 R13 R14 R15 R16 R17 R18 R20 R21 R22 R23 R24 R25 R28 R29 R30 R31 R32 R33 R34 R35 R36 R37 R38 R39 R40 R42 R43 R44 R45 R46 R47 R48 R49 R50 R51 R52 R53 R54 R55 R56: "Resistor"
U3: "STM32 ARM-based 32-bit MCU with 64 Kbytes Flash, 48-pin LQFP, Industrial Temperature"
U5: "Bell"
U8 U15: "USB2UART"
U9: "Low-Power Dual Voltage Comparator"
U18: library part MP2359DJ
Y1 Y2 Y3: library part XTAL, "Crystal Oscillator"

## Free pads (board coordinates)
  round 236.22 hole 120.08: 0(-2559.06,1720.47) 0(-2480.31,0) 0(-2460.63,2429.13) 0(-2303.15,0) 0(0,0) 0(78.74,1720.47) 0(1082.68,2429.13)
  round 60 hole 35.43: 0(-2500,673.78) 0(-2500,752.52) 0(-2500,831.26) 0(-2500,910) 0(-2145.67,3718) 0(-2066.93,3718) 0(-1988.19,3718) 0(-1909.45,3718)
  round 60 hole 30: 0(-1792.48,3568.66) 0(194.53,-69.92) 0(194.53,5.08) 0(274.53,-69.92) 0(274.53,5.08) 3(-2277.48,2492.09)
  round 23.62 hole 11.81: 1(-2342.5,1257.5) 1(-2307.5,1662.5) 1(-2107.48,3152.09) 1(-2082.99,3322.09) 1(-2082.99,3372.09) 1(-2067.5,1022.5) 1(-2067.48,2617.09) 1(-2057.48,2937.09) 1(-2052.48,3272.09) 1(-2022.5,1167.5) 1(-2022.5,1212.5) 1(-1997.48,2617.09) 1(-1977.48,2332.09) 1(-1972.48,3422.09) 1(-1967.48,3547.09) 1(-1937.48,3037.09) 1(-1937.48,3002.09) 1(-1760,350) 1(-1727.5,1267.5) 1(-1720,350) 1(-1687.5,1022.5) 1(-1682.5,1562.5) 1(-1637.5,1577.5) 1(-1632.5,1622.5) 1(-1597.5,1662.5) 1(-1587.48,2612.09) 1(-1582.48,2652.09) 1(-1557.48,2467.09) 1(-1539.68,310) 1(-1482.5,1737.5) 1(-1465,985) 1(-1462.5,1022.5) 1(-1460,1060) 1(-1457.48,3192.09) 1(-1367.5,1202.5) 1(-1362.48,2837.09) 1(-1340,490) 1(-1340,985) 1(-1340,1060) 1(-1337.5,1022.5) 1(-1322.5,1707.5) 1(-1317.48,2677.09) 1(-1317.48,2792.09) 1(-1317.48,3102.09) 1(-1305,490) 1(-1265,490) 1(-1252.48,2677.09) 1(-1252.48,2797.09) 1(-1222.23,1027.77) 1(-1212.48,3317.09) 1(-1202.48,2677.09) 1(-1202.48,2822.09) 1(-1167.5,1202.5) 1(-1167.5,1362.5) 1(-1167.48,3567.09) 1(-1137.5,1277.5) 1(-1072.48,3592.09) 1(-1057.48,3522.09) 1(-1050,265.67) 1(-1050,474.33) 1(-1050,510) 1(-1017.48,3172.09) 1(-1017.48,3417.09) 1(-992.48,3452.09) 1(-952.48,2567.09) 1(-937.48,3427.09) 1(-912.5,1542.5) 1(-907.5,1617.5) 1(-897.48,2932.09) 1(-872.48,3242.09) 1(-872.48,3297.09) 1(-842.48,2942.09) 1(-832.5,497.5) 1(-832.48,2987.09) 1(-802.48,3237.09) 1(-802.48,3282.09) 1(-787.48,2827.09) 1(-787.48,2987.09) 1(-762.48,3297.09) 1(-762.48,3347.09) 1(-747.48,3237.09) 1(-742.5,772.5) 1(-742.48,3187.09) 1(-737.48,2827.09) 1(-732.5,1482.5) 1(-717.48,3247.09) 1(-702.5,1752.5) 1(-682.48,3497.09) 1(-680,1615) 1(-677.48,3322.09) 1(-672.48,3527.09) 1(-667.48,2937.09) 1(-657.48,3557.09) 1(-625,1635) 1(-607.48,2567.09) 1(-597.48,2947.09) 1(-577.5,1617.5) 1(-577.48,2917.09) 1(-567.17,2987.09) 1(-562.5,332.5) 1(-557.5,1797.5) 1(-548.9,318.9) 1(-547.48,3257.09) 1(-537.5,1742.5) 1(-537.48,3222.09) 1(-527.5,1632.5) 1(-527.48,3407.09) 1(-525,295) 1(-525,450) 1(-525,480) 1(-520,415) 1(-512.48,3347.09) 1(-490,1735) 1(-482.48,3327.09) 1(-475,1645) 1(-467.48,3147.09) 1(-427.5,1647.5) 1(-422.5,1207.5) 1(-402.5,297.5) 1(-397.5,1752.5) 1(-397.48,2397.09) 1(-372.5,1212.5) 1(-372.48,3457.09) 1(-357.5,1737.5) 1(-327.48,2837.09) 1(-322.48,3132.09) 1(-322.48,3292.09) 1(-287.48,3627.09) 1(-232.48,2502.09) 1(-217.48,3637.09) 1(-140,260) 1(-127.48,3167.09) 1(-127.48,3212.09) 1(-117.48,2576.77) 1(-97.48,3127.09) 1(-92.48,3247.09) 1(-87.48,2757.09) 1(-82.48,3307.09) 1(-72.48,3462.09) 1(-50.08,2964.69) 1(-45,450) 1(-42.5,1132.5) 1(-7.48,2757.09) 1(2.52,2682.09) 1(32.52,3182.09) 1(37.52,3127.09) 1(50.12,2964.69) 1(57.5,487.5) 1(87.52,3157.09) 1(140.59,2827.09) 1(172.52,2547.09) 1(177.52,2597.09) 1(242.52,3197.09) 1(247.52,2487.09) 1(262.52,3352.09) 1(271.49,2943.2) 1(272.52,2597.09) 1(297.52,3472.09) 1(352.52,2827.09) 1(382.52,3057.09) 1(382.52,3257.4) 1(387.83,1797.09) 1(392.52,282.09) 1(397.83,1972.09) 1(452.83,1802.09) 1(455.24,1696.3) 1(532.52,2322.09) 1(547.83,1302.09) 1(560.43,1696.3) 1(572.52,-62.91) 1(622.52,3517.09) 1(662.52,3542.09) 1(717.52,3362.09) 1(752.52,2772.09) 1(753.31,2544.49) 1(767.52,3177.09) 1(772.52,3117.09) 1(782.52,3517.09) 1(807.52,3552.09) 1(812.52,67.09) 1(832.52,3127.09) 1(882.52,1192.09) 1(882.52,1632.09) 1(887.52,1797.09) 1(902.52,3112.09) 1(904.88,3012.09) 1(904.88,3062.09) 1(927.52,2077.09) 1(937.52,3162.09) 1(942.52,817.09) 1(947.52,2772.09) 1(952.84,-31.61) 1(972.52,122.09) 1(972.52,282.09) 1(982.52,972.09) 1(1002.52,1192.09) 1(1002.52,2072.09) 1(1042.52,907.09) 1(1042.52,3307.09) 1(1062.52,1347.09) 1(1062.52,1417.09) 1(1072.52,122.09) 1(1082.52,2077.09) 1(1127.52,1717.09) 1(1137.52,1002.09) 1(1157.52,2072.09) 1(1157.52,2632.09) 1(1162.52,1107.09) 1(1162.52,1807.09) 1(1162.52,2942.09) 1(1172.52,837.09) 1(1172.52,697.09) 1(1202.52,1387.09) 1(1207.52,902.09) 1(1207.52,1037.09)
  round 26 hole 15: 1(-2272.48,3037.09) 1(-2267.48,3372.09)
  round 30 hole 20: 1(1162.52,1737.09) 1(1202.52,1717.09)
  round 27.56 hole 13.78: 11(-2312.48,3162.09) 11(-2197.48,2957.09) 11(-2197.48,3002.09) 11(-2197.48,3047.09) 11(-2197.48,3092.09) 11(-2197.48,3287.09) 11(-2197.48,3332.09) 11(-2197.48,3377.09) 11(-2197.48,3422.09) 11(-2157.48,2957.09) 11(-2157.48,3002.09) 11(-2157.48,3047.09) 11(-2157.48,3092.09) 11(-2157.48,3287.09) 11(-2157.48,3332.09) 11(-2157.48,3377.09) 11(-2157.48,3422.09) 11(-1957.48,2882.09) 11(-1857.48,2882.09) 11(-1782.48,2882.09) 11(-1387.48,2557.09) 11(-1167.17,3487.09)
  round 50 hole 25: 11(-2192.48,2852.09) 11(-2122.48,2853.3)

## Nets (pads, with @x,y where several pads share a name; then routed paths per layer and width w, separated by ;. In a path a pad name is that pad's centre, name@x,y a point inside that pad or via, vN(x,y) a via of type N, cw(c..) or ccw(c..) an arc to the next point about the centre after c; other vN are vias at no path point)
AD_EPOW: C57.1 R32.2 R33.1 U17.2 | length 2623.3
  Top Layer w7: C57.1@-2009.68,1020 R33.1@-1910.31,1020 -1910.31,1240.31 -1970,1300 -2020,1300 -2050,1330 -2050,1430 -1960,1520 -1960,1595 -1876.18,1678.82 U17.2@-1797.48,1678.82 ; C57.1@-2008.91,1012.23 -1970.38,1020 ; C57.1@-2008.91,1027.77 -1970.38,1020 ; C57.1@-2006.9,1005.46 -1970.38,1020 ; C57.1@-2006.9,1034.54 -1970.38,1020 ; C57.1@-2004.16,1014.48 cw(c-1990.84,1001.15) -1990.84,1020 cw(c-1990.84,1038.85) C57.1@-2004.16,1025.52 ; C57.1@-1999.21,1009.53 cw(c-1973.94,984.25) -1973.94,1020 cw(c-1973.94,1055.75) C57.1@-1999.21,1030.47 ; R33.1@-1924.86,1023.77 -1910.31,1060.29 ; R33.1@-1920.79,1009.53 ccw(c-1946.06,984.25) -1946.06,1020 ccw(c-1946.06,1055.75) R33.1@-1920.79,1030.47 ; R33.1@-1920.79,1031.45 ccw(c-1946.06,1056.73) -1910.31,1056.73 ccw(c-1874.57,1056.73) R33.1@-1899.84,1031.45 ; R33.1@-1918.08,1021.76 -1910.31,1060.29 ; R33.1@-1915.84,1014.48 ccw(c-1929.16,1001.15) -1929.16,1020 ccw(c-1929.16,1038.85) R33.1@-1915.84,1025.52 ; R33.1@-1915.84,1026.5 ccw(c-1929.16,1039.83) -1910.31,1039.83 ccw(c-1891.47,1039.83) R33.1@-1904.79,1026.5 ; R33.1@-1913.1,1005.46 -1949.62,1020 ; R33.1@-1913.1,1034.54 -1949.62,1020 ; R33.1@-1911.09,1012.23 -1949.62,1020 ; R33.1@-1911.09,1027.77 -1949.62,1020 ; R33.1@-1910.31,1020.98 -1910.31,1060.29 ; -1910.31,1085 -1800,1085 -1750.32,1035.32 R32.2@-1750.32,1020 ; R33.1@-1902.55,1021.76 -1910.31,1060.29 ; R33.1@-1895.77,1023.77 -1910.31,1060.29 ; U17.2@-1828.61,1667.37 ccw(c-1856.24,1639.74) -1856.24,1678.82 ccw(c-1856.24,1717.89) U17.2@-1828.61,1690.26 ; U17.2@-1823.66,1672.32 ccw(c-1839.34,1656.64) -1839.34,1678.82 ccw(c-1839.34,1700.99) U17.2@-1823.66,1685.31 ; U17.2@-1820.38,1662.96 -1857.85,1678.82 ; U17.2@-1820.38,1694.68 -1857.85,1678.82 ; U17.2@-1818.2,1669.69 -1857.85,1678.82 ; U17.2@-1818.2,1687.95 -1857.85,1678.82 ; U17.2@-1817.17,1678.82 -1857.85,1678.82 ; -1785.73,1070.73 cw(c-1835.47,1020.98) R32.2@-1765.12,1020.98 ; -1773.78,1058.78 cw(c-1811.57,1020.98) R32.2@-1758.12,1020.98 ; R32.2@-1763.87,1015.03 -1775.96,1060.96 ; -1761.83,1046.83 cw(c-1787.67,1020.98) R32.2@-1751.12,1020.98 ; R32.2@-1757.21,1017.32 -1775.96,1060.96 ; R32.2@-1750.32,1020.98 -1775.96,1060.96 ; R32.2@-1744.11,1025.73 -1775.96,1060.96 ; R32.2@-1739.25,1030.82 -1775.96,1060.96
AD_POW: C11.1 pad.1@-872.48,3242.09 pad.1@-992.48,3452.09 R5.2 R6.1 U3.14 | length 2692.4
  Top Layer w7: pad.1@-1000.72,3451.03 -992.48,3419.28 ; pad.1@-998.36,3446.21 cw(c-1012.54,3432.02) -992.48,3432.02 cw(c-972.42,3432.02) pad.1@-986.6,3446.21 ; pad.1@-992.48,3442.09 -992.48,3277.09 -957.48,3242.09 pad.1@-872.48,3242.09 -905.29,3242.09 ; pad.1@-992.48,3452.09 -992.48,3419.28 ; pad.1@-984.24,3451.03 -992.48,3419.28 ; pad.1@-878.36,3236.21 ccw(c-892.54,3222.02) -892.54,3242.09 ccw(c-892.54,3262.15) pad.1@-878.36,3247.96 ; pad.1@-873.53,3233.84 -905.29,3242.09 ; pad.1@-873.53,3250.33 -905.29,3242.09
  Bottom Layer w7: C11.1@-1321.71,3415.86 -1307.17,3452.38 ; R6.1@-1321.71,3488.31 -1307.17,3451.8 ; C11.1@-1317.64,3423.54 ccw(c-1342.91,3448.82) -1307.17,3448.82 ccw(c-1271.42,3448.82) C11.1@-1296.7,3423.54 ; R6.1@-1317.64,3480.63 cw(c-1342.91,3455.35) -1307.17,3455.35 cw(c-1271.42,3455.36) R6.1@-1296.7,3480.63 ; C11.1@-1314.93,3413.85 -1307.17,3452.38 ; R6.1@-1314.93,3490.33 -1307.17,3451.8 ; C11.1@-1312.69,3418.59 ccw(c-1326.01,3431.92) -1307.17,3431.92 ccw(c-1288.32,3431.92) C11.1@-1301.64,3418.59 ; R6.1@-1312.69,3485.58 cw(c-1326.01,3472.25) -1307.17,3472.25 cw(c-1288.32,3472.25) R6.1@-1301.64,3485.58 ; C11.1@-1307.17,3412.09 R6.1@-1307.17,3492.09 -1232.8,3492.09 R5.2@-1227.8,3487.09 ; C11.1@-1307.17,3413.07 -1307.17,3452.38 ; R6.1@-1307.17,3491.1 -1307.17,3451.8 ; R6.1@-1306.39,3484.32 -1267.86,3492.09 ; R6.1@-1306.39,3499.86 -1267.86,3492.09 ; R6.1@-1304.38,3477.54 -1267.86,3492.09 ; R6.1@-1304.38,3506.63 -1267.86,3492.09 ; R6.1@-1301.64,3486.57 cw(c-1288.32,3473.24) -1288.32,3492.09 cw(c-1288.32,3510.93) R6.1@-1301.64,3497.61 ; C11.1@-1299.4,3413.85 -1307.17,3452.38 ; R6.1@-1299.4,3490.33 -1307.17,3451.8 ; R6.1@-1296.7,3481.62 cw(c-1271.42,3456.34) -1271.42,3492.09 cw(c-1271.42,3527.83) R6.1@-1296.7,3502.56 ; C11.1@-1292.62,3415.86 -1307.17,3452.38 ; R6.1@-1292.62,3488.31 -1307.17,3451.8 ; -1273.24,3492.09 cw(c-1273.24,3442.63) R5.2@-1238.27,3477.6 ; -1256.34,3492.09 cw(c-1256.34,3459.53) R5.2@-1233.32,3482.55 ; -1253.85,3492.09 ccw(c-1253.85,3514.12) R5.2@-1238.27,3498.54 ; R5.2@-1238.87,3476.27 -1207.48,3452.09 ; R5.2@-1234.07,3481.46 -1207.48,3452.09 ; R5.2@-1232.48,3477.09 -1207.48,3452.09 ; R5.2@-1231.98,3473.87 -1267.65,3492.09 ; R5.2@-1229.33,3480.42 -1267.65,3492.09 ; R5.2@-1229.06,3502.82 -1267.65,3492.09 ; R5.2@-1227.8,3486.1 -1207.48,3452.09 ; R5.2@-1227.8,3488.07 -1267.65,3492.09 ; R5.2@-1227.77,3495.88 -1267.65,3492.09 ; R5.2@-1221.47,3481.52 ccw(c-1210.96,3473.92) -1220.14,3464.74 ; R5.2@-1220.73,3489.43 -1207.48,3452.09 ; R5.2@-1215.8,3477.42 ccw(c-1204.23,3469.04) -1214.33,3458.94 ; R5.2@-1213.89,3491.19 -1207.48,3452.09 ; pad.1@-998.36,3446.21 ccw(c-1012.54,3432.02) -1012.54,3452.09 ccw(c-1012.54,3472.15) pad.1@-998.36,3457.96 ; pad.1@-993.53,3443.84 -1025.29,3452.09 ; pad.1@-993.53,3460.33 -1025.29,3452.09 ; U3.14@-935.94,3158.5 -881.06,3158.5 -872.48,3167.09 pad.1@-872.48,3242.09 ; U3.14@-910.35,3158.5 -884.43,3158.5 ; pad.1@-880.72,3241.03 -872.48,3209.28 pad.1@-864.24,3241.03 ; pad.1@-878.36,3236.21 cw(c-892.54,3222.02) -872.48,3222.02 cw(c-852.42,3222.02) pad.1@-866.6,3236.21 ; -1207.48,3452.09 pad.1@-992.48,3452.09 -1025.29,3452.09
BEEP: pad.1@177.52,2597.09 pad.1@272.52,2597.09 pad.1@-322.48,3132.09 pad.1@-322.48,3292.09 R1.2 U3.39 | length 2990.2
  Top Layer w7: pad.1@-330.72,3133.14 -322.48,3164.9 ; pad.1@-330.72,3291.03 -322.48,3259.28 ; pad.1@-328.36,3137.96 ccw(c-342.54,3152.15) -322.48,3152.15 ccw(c-302.42,3152.15) pad.1@-316.6,3137.96 ; pad.1@-328.36,3286.21 cw(c-342.54,3272.02) -322.48,3272.02 cw(c-302.42,3272.02) pad.1@-316.6,3286.21 ; pad.1@-322.48,3132.09 -322.48,3164.9 ; pad.1@-322.48,3142.09 pad.1@-322.48,3292.09 -322.48,3259.28 ; pad.1@-314.24,3133.14 -322.48,3164.9 ; pad.1@-314.24,3291.03 -322.48,3259.28 ; pad.1@177.52,2597.09 pad.1@277.52,2597.09 ; pad.1@178.57,2588.84 210.33,2597.09 pad.1@178.57,2605.33 ; pad.1@183.4,2591.21 cw(c197.58,2577.02) 197.58,2597.09 cw(c197.58,2617.15) pad.1@183.4,2602.96 ; pad.1@266.64,2591.21 ccw(c252.46,2577.02) 252.46,2597.09 ccw(c252.46,2617.15) pad.1@266.64,2602.96 ; pad.1@271.47,2588.84 239.71,2597.09 ; pad.1@271.47,2605.33 239.71,2597.09 ; pad.1@272.52,2597.09 239.71,2597.09
  Bottom Layer w7: U3.39@-619.02,3315.98 -576.38,3315.98 ; U3.39@-593.43,3315.98 -576.38,3315.98 ; -328.48,3281.09 ccw(c-331.1,3283.71) pad.1@-328.44,3286.3 ; -328.13,3281.43 cw(c-322.48,3275.78) pad.1@-322.48,3283.78 ; pad.1@-322.48,3132.09 -182.48,3132.09 -157.48,3107.09 -157.48,2942.09 pad.1@182.52,2602.09 ; pad.1@-322.48,3287.09 -330.98,3278.59 -413.98,3278.59 -437.48,3302.09 -562.48,3302.09 -576.38,3315.98 ; pad.1@-321.43,3123.84 -289.67,3132.09 pad.1@-321.43,3140.33 ; pad.1@-316.6,3126.21 cw(c-302.42,3112.02) -302.42,3132.09 cw(c-302.42,3152.15) pad.1@-316.6,3137.96 ; 156.26,2628.35 cw(c125,2597.09) pad.1@169.21,2597.09 ; 168.21,2616.4 cw(c148.9,2597.09) pad.1@176.21,2597.09 ; pad.1@170.22,2593.1 155.07,2629.54 ; pad.1@177.52,2597.09 155.07,2629.54 ; pad.1@183.82,2602.51 155.07,2629.54 ; pad.1@272.52,2597.09 602.83,2597.09 R1.2@662.52,2537.4 ; pad.1@273.57,2588.84 305.33,2597.09 pad.1@273.57,2605.33 ; pad.1@278.4,2591.21 cw(c292.58,2577.02) 292.58,2597.09 cw(c292.58,2617.15) pad.1@278.4,2602.96 ; 635.56,2564.36 cw(c608.6,2537.4) R1.2@646.73,2537.4 ; 637.94,2561.98 ccw(c661.54,2585.58) R1.2@661.54,2552.21 ; R1.2@647.51,2552.41 cw(c632.5,2537.4) R1.2@653.73,2537.4 ; R1.2@649.39,2528.93 629.36,2570.56 ; R1.2@655.49,2532.46 629.36,2570.56 ; R1.2@661.54,2537.4 629.36,2570.56 ; R1.2@666.66,2543.29 629.36,2570.56 ; R1.2@670.37,2549.28 629.36,2570.56
BOOT1: pad.1@-527.48,3407.09 pad.1@-872.48,3297.09 R12.1 U3.20 | length 1735
  Top Layer w6: pad.1@-881.07,3299.03 -872.48,3317.09 ; pad.1@-878.43,3303.59 ccw(c-890.77,3317.09) -872.48,3317.09 ; pad.1@-872.48,3297.09 -872.48,3317.09 ; pad.1@-866.53,3303.59 cw(c-854.19,3317.09) -872.48,3317.09 ; pad.1@-863.89,3299.03 -872.48,3317.09 ; -572.89,3397.09 ccw(c-572.89,3452.5) pad.1@-533.71,3413.32 ; -558.41,3397.09 ccw(c-558.41,3438.02) pad.1@-529.47,3409.07 ; -543.92,3397.09 ccw(c-543.92,3423.53) pad.1@-525.23,3404.83 ; pad.1@-530.68,3415.29 -565.2,3397.09 ; pad.1@-526.2,3398.37 -565.2,3397.09 ; -872.48,3317.09 -792.48,3397.09 -537.48,3397.09 pad.1@-527.48,3407.09 -565.2,3397.09
  Bottom Layer w6: U3.20@-927.48,3277.09 -882.48,3277.09 ; U3.20@-910.35,3276.61 -887.43,3277.09 ; U3.20@-909,3275.26 cw(c-904.58,3270.84) -904.58,3277.09 ; pad.1@-880.98,3299.4 -882.48,3277.09 ; pad.1@-872.48,3287.09 -882.48,3277.09 ; pad.1@-872.48,3297.09 -882.48,3277.09 ; pad.1@-865.53,3291.67 -882.48,3277.09 ; pad.1@-534.15,3412.85 -506.79,3437.78 ; pad.1@-524.67,3407.09 cw(c-493.74,3407.09) -515.61,3428.96 ; pad.1@-519.64,3403.07 -506.79,3437.78 ; pad.1@-518.67,3407.09 cw(c-473.26,3407.09) -505.37,3439.2 ; -256.18,3577.09 cw(c-256.18,3539.06) R12.1@-229.29,3565.95 ; -254.66,3577.09 ccw(c-254.66,3612.97) R12.1@-229.29,3587.6 ; -241.69,3577.09 cw(c-241.69,3553.54) R12.1@-225.05,3570.19 ; -240.17,3577.09 ccw(c-240.17,3598.48) R12.1@-225.05,3583.35 ; R12.1@-227.48,3577.09 -367.48,3577.09 -527.48,3417.09 pad.1@-527.48,3407.09 -506.79,3437.78 ; R12.1@-221.82,3561.84 -254.78,3577.09 ; R12.1@-221.56,3591.76 -254.78,3577.09 ; R12.1@-219.74,3567.55 -254.78,3577.09 ; R12.1@-219.58,3586.01 -254.78,3577.09 ; R12.1@-218.64,3573.47 -254.78,3577.09 ; R12.1@-218.59,3580.08 -254.78,3577.09 ; R12.1@-218.46,3576.77 -254.78,3577.09
C1: P32.4 R46.1 R52.2 | length 1642.4
  Top Layer w7: R52.2@555.24,1804.24 569.68,1834.68 ; R52.2@559.67,1811.89 ccw(c538.74,1834.68) 569.68,1834.68 ; R52.2@561.42,1786.73 600,1769.68 ; R52.2@561.93,1801.89 569.68,1834.68 ; R52.2@564.8,1792.93 600,1769.68 ; R46.1@565.46,1493.1 580,1529.62 ; R46.1@569.53,1500.79 ccw(c544.25,1526.06) 580,1526.06 ccw(c615.75,1526.06) R46.1@590.47,1500.79 ; R52.2@569.68,1784.21 cw(c569.68,1746.09) 596.64,1773.04 ; R52.2@569.68,1791.21 cw(c569.68,1769.98) R52.2@584.69,1784.99 ; R52.2@569.68,1799.02 600,1769.68 ; R52.2@569.68,1800.98 569.68,1834.68 ; R46.1@572.23,1491.09 580,1529.62 ; R46.1@574.48,1495.84 ccw(c561.15,1509.16) 580,1509.16 ccw(c598.85,1509.16) R46.1@585.52,1495.84 ; R52.2@575.61,1804.1 600,1769.68 ; R52.2@577.44,1801.89 569.68,1834.68 ; R52.2@579.7,1811.89 cw(c600.63,1834.68) 569.68,1834.68 ; R46.1@580,1490.31 580,1530 560,1550 560,1610 600,1650 600,1769.68 ; R52.2@581.69,1807.68 600,1769.68 ; R52.2@584.13,1804.24 569.68,1834.68 ; R52.2@584.49,1799.02 ccw(c617.86,1799.02) 594.27,1775.42 ; 585,1635 585,1636.81 ; R46.1@587.77,1491.09 580,1529.62 ; R46.1@594.54,1493.1 580,1529.62 ; P32.4@614.06,1928.25 625,1890 ; P32.4@621.1,1910.55 cw(c611.68,1901.13) P32.4@625,1901.13 ; P32.4@621.17,1929.6 625,1890 ; 625,1887.78 cw(c640.81,1887.78) P32.4@639.74,1903.56 ; 625,1895.27 cw(c640.3,1895.27) P32.4@639.27,1910.54 ; P32.4@625,1902.76 cw(c639.8,1902.76) P32.4@638.79,1917.52 ; P32.4@628.27,1929.65 625,1890 ; P32.4@638.11,1927.56 625,1890 ; P32.4@640,1960 625,1945 625,1890 ; P32.4@647.11,1923.07 625,1890 ; P32.4@652.64,1918.61 625,1890 ; P32.4@657.36,1913.13 625,1890 ; 569.68,1834.68 R52.2@569.68,1800 600,1769.68 ; 569.68,1834.68 625,1890
C2: P32.3 pad.1@452.83,1802.09 pad.1@547.83,1302.09 R51.1 R53.2 | length 2091.2
  Top Layer w7: R53.2@445.1,1799.04 R53.2@454.76,1785.87 ; R53.2@445.57,1806.12 R53.2@454.76,1814.13 ; R53.2@450.32,1800 475,1800 ; R53.2@451.55,1792.29 475,1800 ; R53.2@451.55,1807.71 475,1800 ; R53.2@458.71,1796.21 cw(c467.86,1787.06) R53.2@467.86,1800 ; R53.2@459.23,1807.4 ccw(c475,1820.51) 475,1800 ; R53.2@461,1803.65 R53.2@454.76,1814.13 ; R53.2@461.06,1800.93 R53.2@454.76,1785.87 ; R53.2@463.38,1793.03 cw(c475,1786.83) 475,1800 ; R53.2@463.38,1806.97 ccw(c475,1813.17) 475,1800 ; P32.3@535.34,1928.71 545,1878.92 ; P32.3@542.43,1929.57 545,1878.92 ; 545,1868.24 cw(c585.95,1868.24) P32.3@569.21,1905.6 ; 545,1879.04 cw(c581.1,1879.04) P32.3@566.34,1911.99 ; 545,1889.85 cw(c576.26,1889.85) P32.3@563.48,1918.38 ; P32.3@545,1900.65 cw(c571.42,1900.65) P32.3@560.62,1924.77 ; P32.3@549.49,1929.44 545,1878.92 ; P32.3@559.37,1927.56 545,1878.92 ; P32.3@565,1985 545,1965 545,1870 475,1800 ; P32.3@568.69,1923.77 545,1878.92 ; P32.3@574.68,1920.04 545,1878.92 ; P32.3@580.17,1915.46 545,1878.92 ; pad.1@452.83,1802.09 475,1800 ; pad.1@452.83,1802.09 R53.2@454.76,1814.13 ; pad.1@452.83,1802.09 475,1800 ; pad.1@452.83,1802.09 R53.2@454.76,1785.87 ; pad.1@452.83,1802.09 475,1800 ; pad.1@452.83,1802.09 475,1800 ; pad.1@452.83,1802.09 475,1800 ; R53.2@453.61,1793.81 475,1800 ; R53.2@453.61,1793.81 475,1800 ; R53.2@453.61,1793.81 475,1800 ; R53.2@453.61,1793.81 475,1800 ; R53.2@453.61,1793.81 475,1800 ; R53.2@454.76,1785.87 475,1800 ; R53.2@454.76,1814.13 475,1800 ; R53.2@455.14,1810.07 475,1800 ; R53.2@455.14,1810.07 475,1800 ; R53.2@455.14,1810.07 475,1800 ; R53.2@455.14,1810.07 475,1800 ; R53.2@455.14,1810.07 475,1800
  Bottom Layer w7: pad.1@444.68,1800.51 455,1769.03 ; pad.1@446.96,1796.21 cw(c427.54,1776.79) 455,1776.79 ; pad.1@452.83,1802.09 455,1769.03 ; 455,1787.25 cw(c467.67,1787.25) pad.1@458.71,1796.21 ; pad.1@455,1795 455,1760 547.83,1667.17 pad.1@547.83,1302.09 ; pad.1@461.13,1801.59 455,1769.03 ; pad.1@539.59,1303.14 547.83,1334.9 pad.1@556.08,1303.14 ; pad.1@541.96,1307.96 ccw(c527.77,1322.15) 547.83,1322.15 ccw(c567.9,1322.15) pad.1@553.71,1307.96
CAR_RX: P7.2 pad.1@782.52,3517.09 pad.1@-657.48,3557.09 U3.30 U8.3 | length 4757.3
  Top Layer w6: pad.1@-657.48,3557.09 -452.48,3557.09 -442.48,3567.09 537.52,3567.09 602.52,3632.09 767.52,3632.09 837.52,3562.09 837.52,3532.09 822.52,3517.09 pad.1@787.52,3517.09 ; pad.1@-656.18,3548.37 -627.67,3557.09 pad.1@-656.18,3565.8 ; pad.1@-651.25,3550.86 cw(c-636.21,3535.82) -636.21,3557.09 cw(c-636.21,3578.36) pad.1@-651.25,3563.32 ; pad.1@782.52,3517.09 812.33,3517.09 ; pad.1@783.82,3508.37 812.33,3517.09 ; pad.1@783.82,3525.8 812.33,3517.09 ; pad.1@788.75,3510.86 cw(c803.79,3495.82) 803.79,3517.09 cw(c803.79,3538.36) pad.1@788.75,3523.32
  Bottom Layer w6: U3.30@-787.32,3405.55 -787.32,3442.24 ; U3.30@-787.32,3431.14 -787.32,3442.24 ; pad.1@-665.18,3552.8 ccw(c-672.48,3548.73) -672.48,3557.09 ; pad.1@-665.18,3561.38 cw(c-672.48,3565.45) -672.48,3557.09 ; pad.1@-660.07,3548.66 -672.48,3557.09 ; pad.1@-660.07,3565.51 -672.48,3557.09 ; P7.2@341.8,2390.52 377.52,2367.09 ; P7.2@345.59,2395.47 377.52,2367.09 ; P7.2@349.98,2399.75 377.52,2367.09 ; P7.2@354.87,2403.31 377.52,2367.09 ; P7.2@370.76,2409.27 377.52,2367.09 ; P7.2@376.79,2409.8 377.52,2367.09 ; P7.2@382.91,2409.47 377.52,2367.09 ; P7.2@389.02,2408.23 377.52,2367.09 ; pad.1@773.81,3515.78 782.52,3487.28 ; pad.1@776.29,3510.86 cw(c761.25,3495.82) 782.52,3495.82 cw(c803.79,3495.82) pad.1@788.75,3510.86 ; pad.1@791.23,3515.78 782.52,3487.28 ; 848.35,3301.26 cw(c809.18,3262.09) U8.3@864.57,3262.09 ; 858.59,3291.01 cw(c829.67,3262.09) U8.3@870.57,3262.09 ; 868.84,3280.77 cw(c850.15,3262.09) U8.3@876.57,3262.09 ; U8.3@892.52,3257.09 782.52,3367.09 pad.1@782.52,3517.09 782.52,3487.28 ; U8.3@899.95,3254.78 867.86,3281.74 ; U8.3@904.88,3262.09 867.86,3281.74 ; U8.3@908.17,3270.26 867.86,3281.74 ; U8.3@927.52,3262.09 974.67,3214.93 974.67,2559.24 782.52,2367.09 377.52,2367.09 ; U8.3@929.7,3256.34 949.36,3240.25 ; U8.3@936.38,3262.09 949.36,3240.25 ; U8.3@939.19,3262.09 ccw(c967.36,3262.09) 947.44,3242.17 ; U8.3@944.62,3265.21 949.36,3240.25 ; U8.3@945.19,3262.09 ccw(c987.85,3262.09) 957.68,3231.92 ; -787.32,3442.24 -672.48,3557.09 ; -672.48,3557.09 pad.1@-657.48,3557.09 -672.48,3557.09 ; 377.52,2367.09 P7.2@362.52,2407.09 362.52,2382.09 377.52,2367.09
CAR_TX: P7.3 pad.1@807.52,3552.09 pad.1@-672.48,3527.09 U3.31 U8.2 | length 4692.5
  Top Layer w6: pad.1@-672.48,3527.09 -457.48,3527.09 -437.48,3547.09 542.52,3547.09 602.52,3607.09 757.52,3607.09 pad.1@807.52,3557.09 ; pad.1@-671.18,3518.37 -642.67,3527.09 pad.1@-671.18,3535.8 ; pad.1@-666.25,3520.86 cw(c-651.21,3505.82) -651.21,3527.09 cw(c-651.21,3548.36) pad.1@-666.25,3533.32 ; 788.94,3575.66 cw(c765.37,3552.09) pad.1@798.71,3552.09 ; 799.19,3565.42 cw(c785.85,3552.09) pad.1@804.71,3552.09 ; pad.1@800.03,3547.45 785.8,3578.81 ; 801.01,3563.59 ccw(c807.52,3570.1) pad.1@807.52,3560.9 ; pad.1@807.52,3552.09 785.8,3578.81 ; pad.1@813.59,3558.47 785.8,3578.81
  Bottom Layer w6: U3.31@-767.64,3405.55 -767.64,3441.93 ; U3.31@-767.64,3431.14 -767.64,3441.93 ; pad.1@-672.48,3527.09 -682.48,3527.09 -767.64,3441.93 ; P7.3@262.52,2407.09 297.52,2407.09 ; P7.3@263.56,2398.62 297.52,2407.09 ; P7.3@263.56,2415.55 297.52,2407.09 ; P7.3@265.53,2392.88 297.52,2407.09 ; P7.3@265.53,2421.3 297.52,2407.09 ; P7.3@268.54,2387.46 297.52,2407.09 ; P7.3@268.54,2426.71 297.52,2407.09 ; P7.3@272.57,2382.54 297.52,2407.09 ; P7.3@272.57,2431.64 297.52,2407.09 ; P7.3@288.06,2399.92 cw(c297.52,2397.26) 297.52,2407.09 ; P7.3@288.06,2414.26 ccw(c297.52,2416.91) 297.52,2407.09 ; pad.1@798.81,3550.78 807.52,3522.28 ; pad.1@801.29,3545.86 cw(c786.25,3530.82) 807.52,3530.82 cw(c828.79,3530.82) pad.1@813.75,3545.86 ; pad.1@816.23,3550.78 807.52,3522.28 ; 839.79,3334.81 ccw(c873.39,3368.4) U8.2@873.39,3320.9 ; 850.04,3324.57 ccw(c873.39,3347.92) U8.2@873.39,3314.9 ; 860.28,3314.33 ccw(c873.39,3327.43) U8.2@873.39,3308.9 ; U8.2@867.57,3305.46 832.47,3342.13 ; U8.2@873.39,3312.09 832.47,3342.13 ; U8.2@877.97,3319.61 832.47,3342.13 ; U8.2@904.88,3312.09 862.52,3312.09 807.52,3367.09 pad.1@807.52,3552.09 807.52,3522.28 ; U8.2@930.42,3305.59 961.83,3282.78 ; U8.2@936.38,3303.28 cw(c936.38,3291.32) 944.83,3299.77 ; U8.2@936.38,3312.09 961.83,3282.78 ; U8.2@937.52,3307.09 987.52,3257.09 987.52,2552.09 782.52,2347.09 357.52,2347.09 297.52,2407.09 ; U8.2@939.19,3312.09 ccw(c955.29,3312.09) U8.2@943.9,3300.7 ; U8.2@943.64,3317.07 961.83,3282.78 ; U8.2@945.19,3312.09 ccw(c975.77,3312.09) 954.15,3290.46